# Altium PCB PCBtc.PcbDoc (part 1 of 3)
Units mm, origin at the board's own origin, x right, y up, seen from the top; angles counter-clockwise.
Board outline 94.5 x 103.5 mm, 2 copper layers (Top Layer, Bottom Layer), stack 1.671 mm thick; 71 components, 63 nets, 236 pads, 46 vias.
Unrouted connection lines stored in the file: 2.
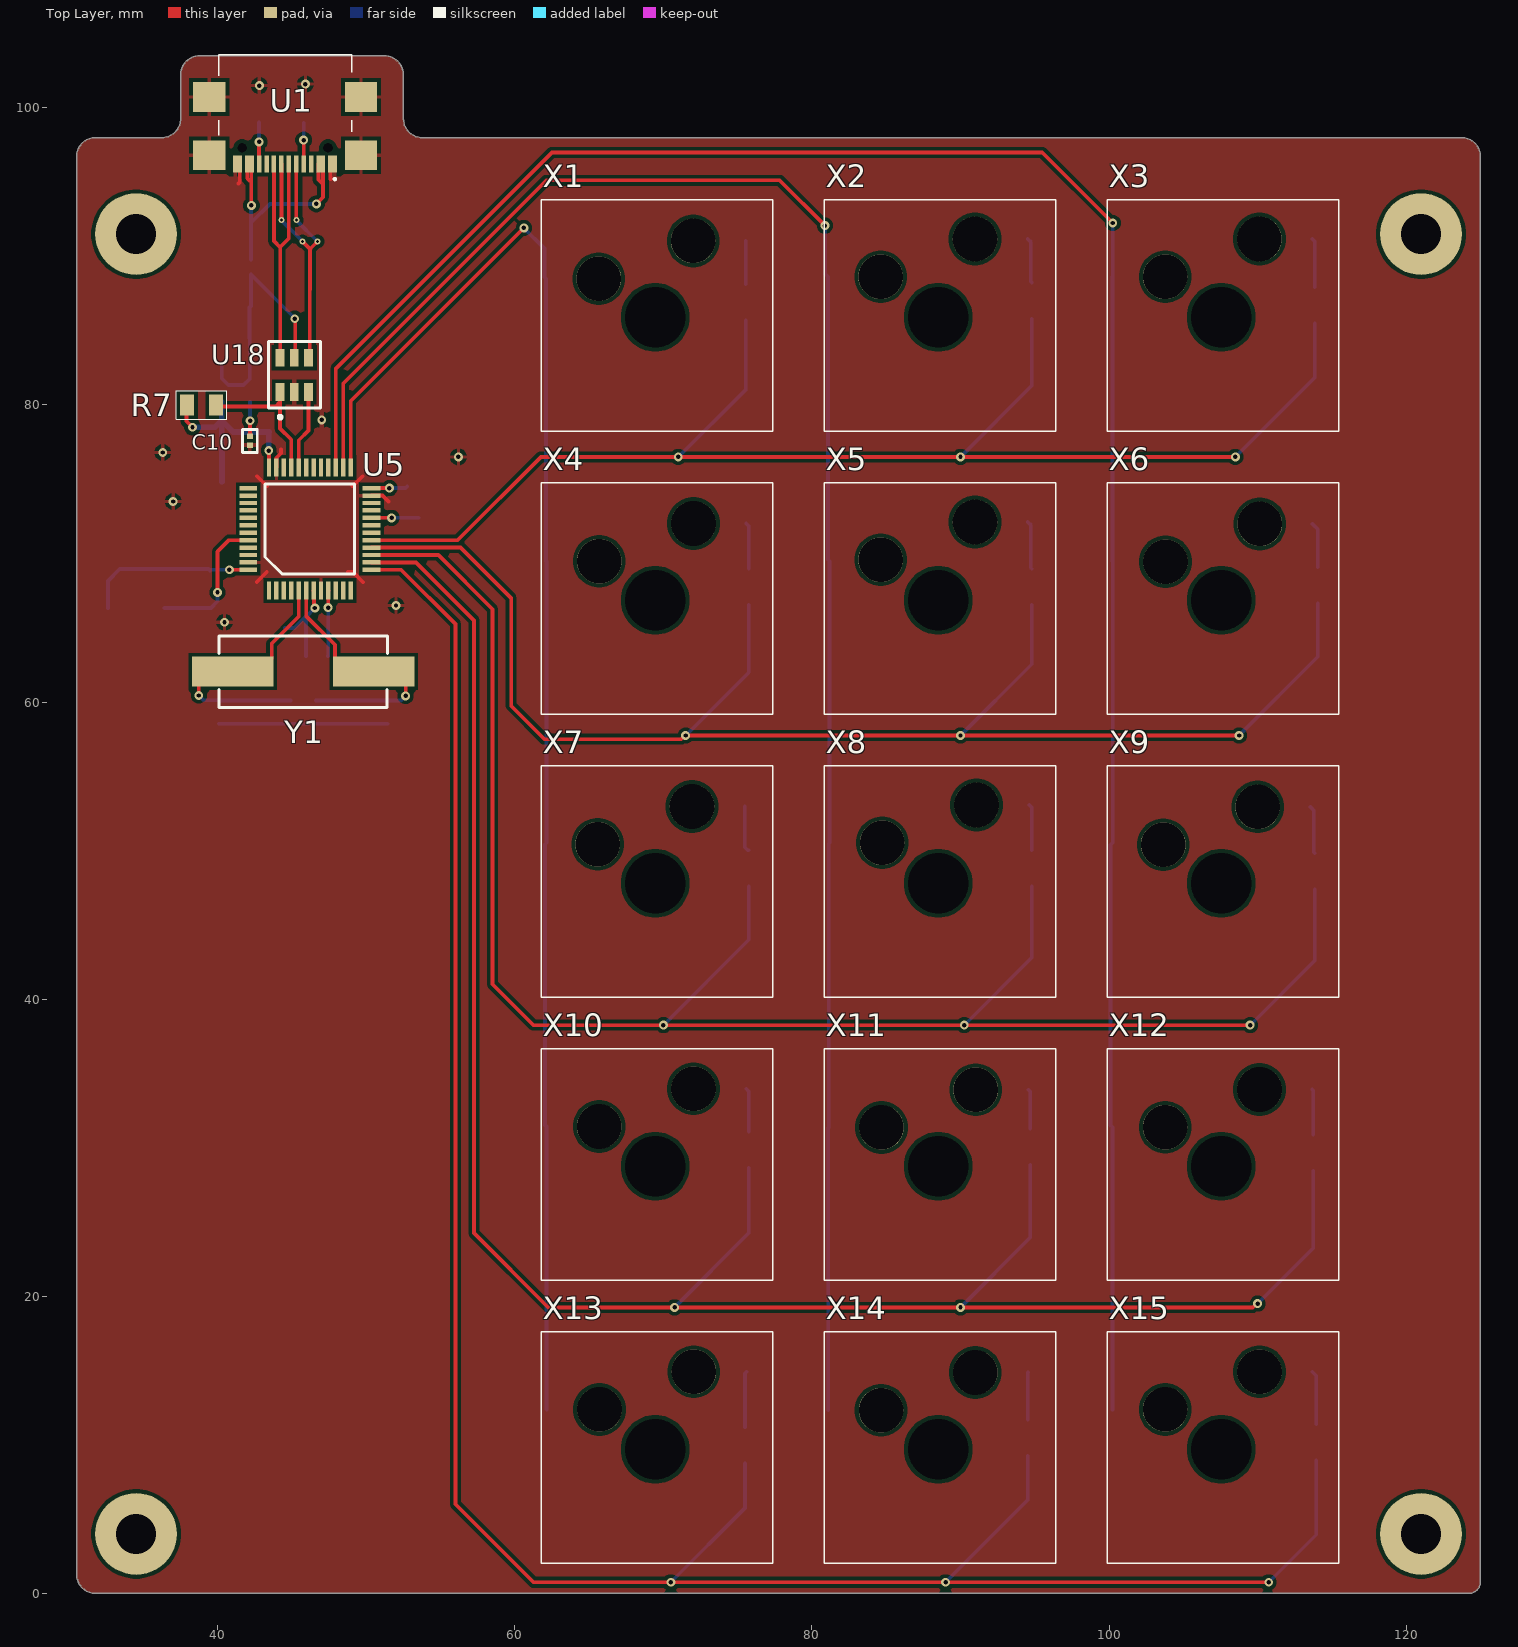
[diagram p0: Top Layer view]
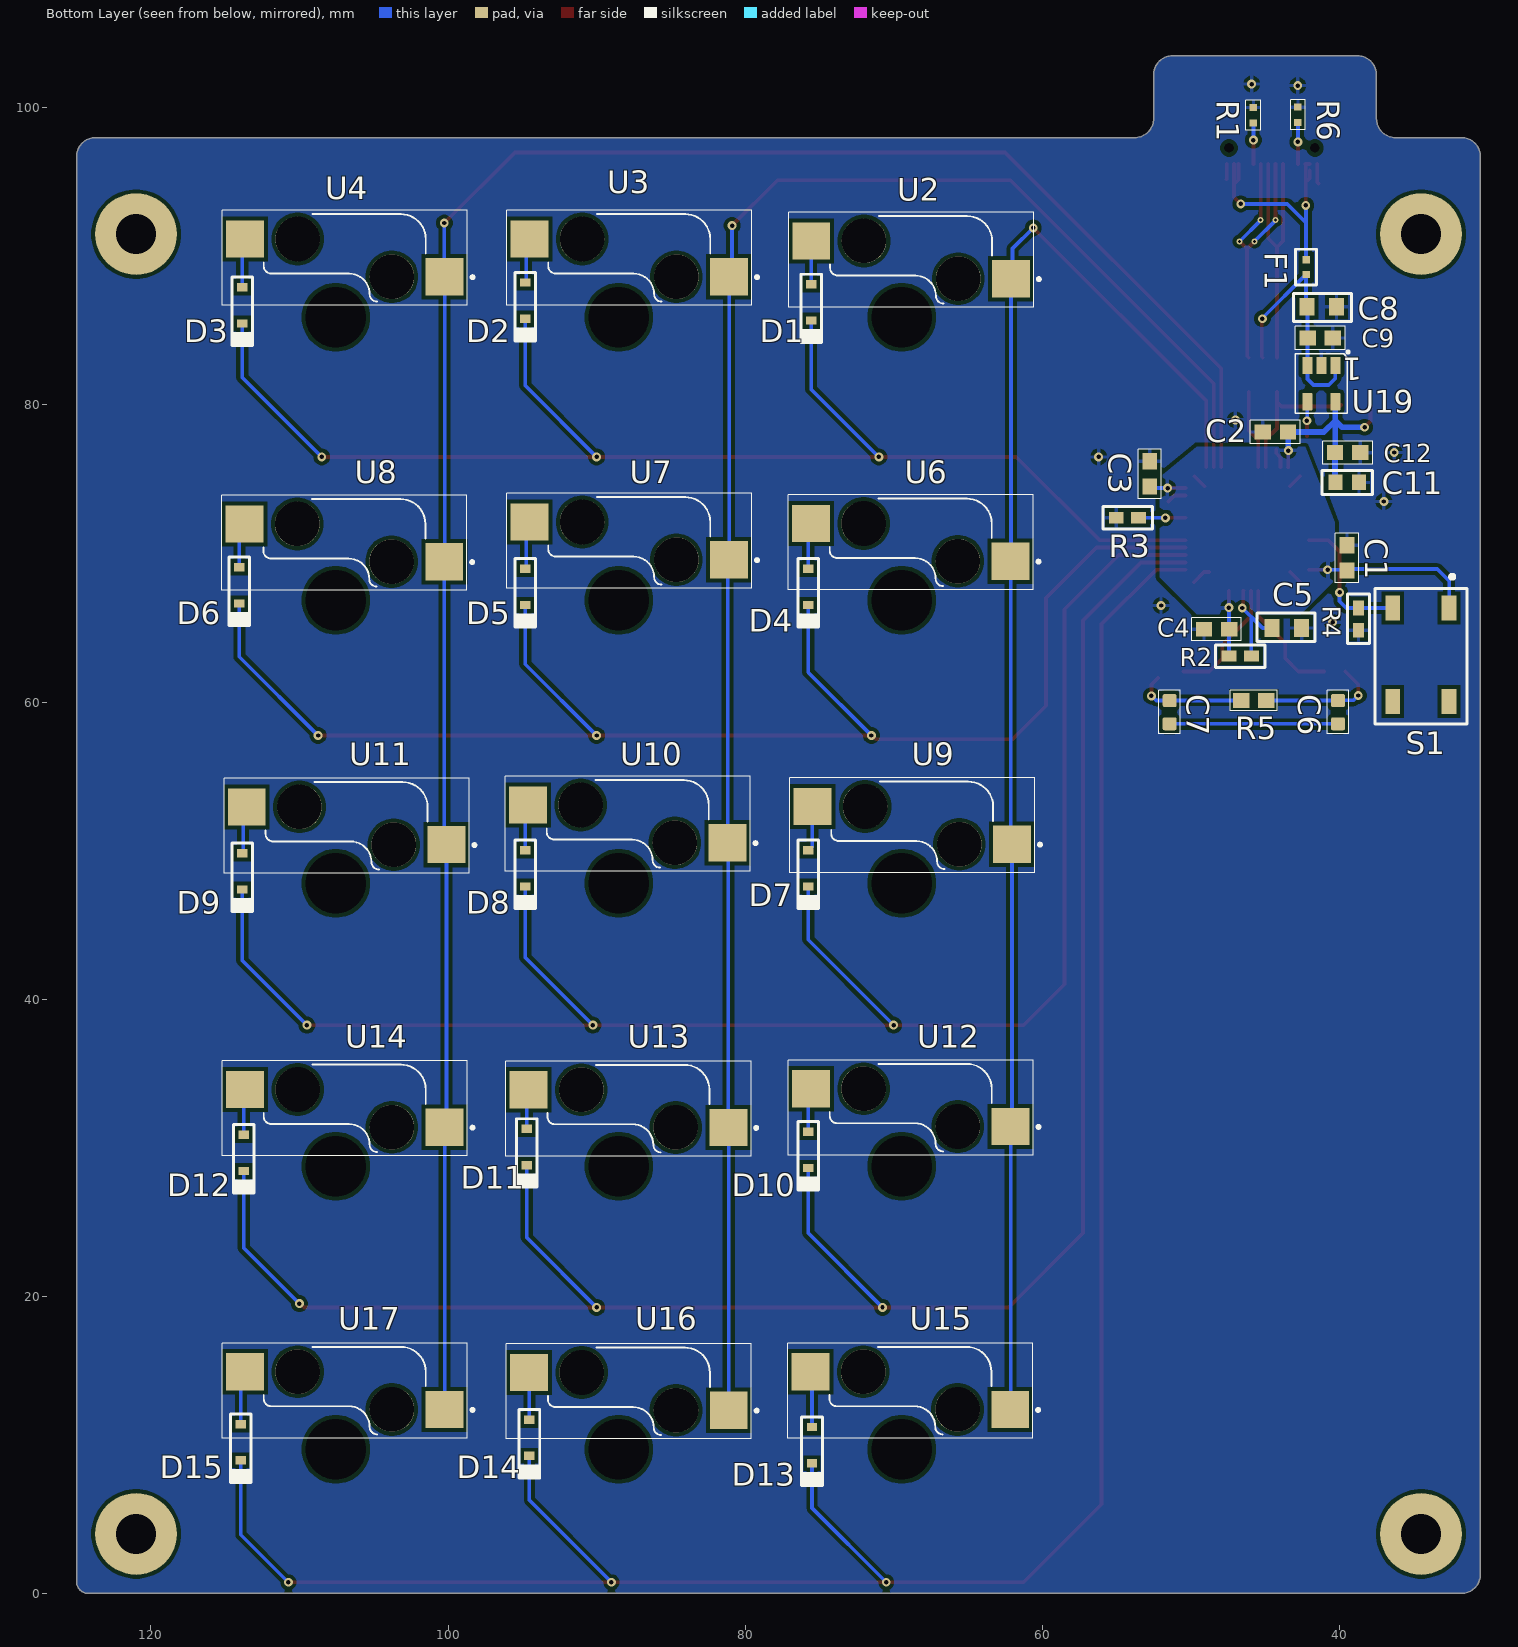
[diagram p1: Bottom Layer view, seen from below]
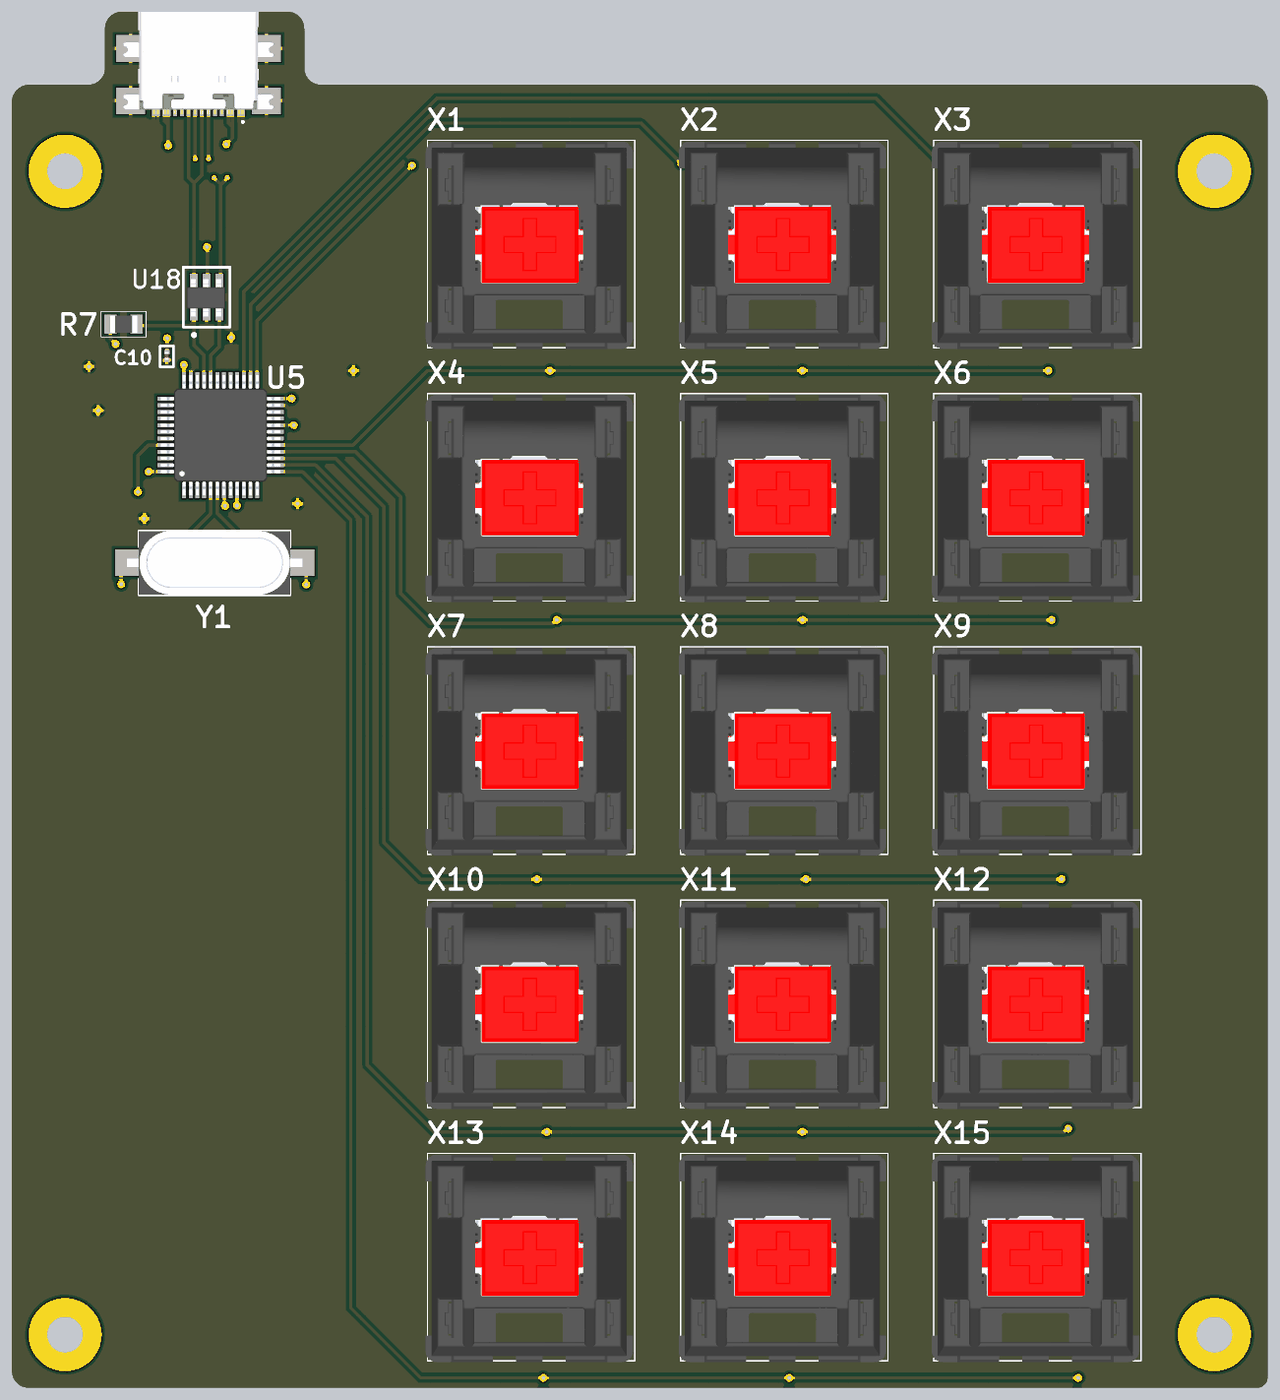
[diagram p2: 3D render of the assembled board from above, using the file's embedded part models]
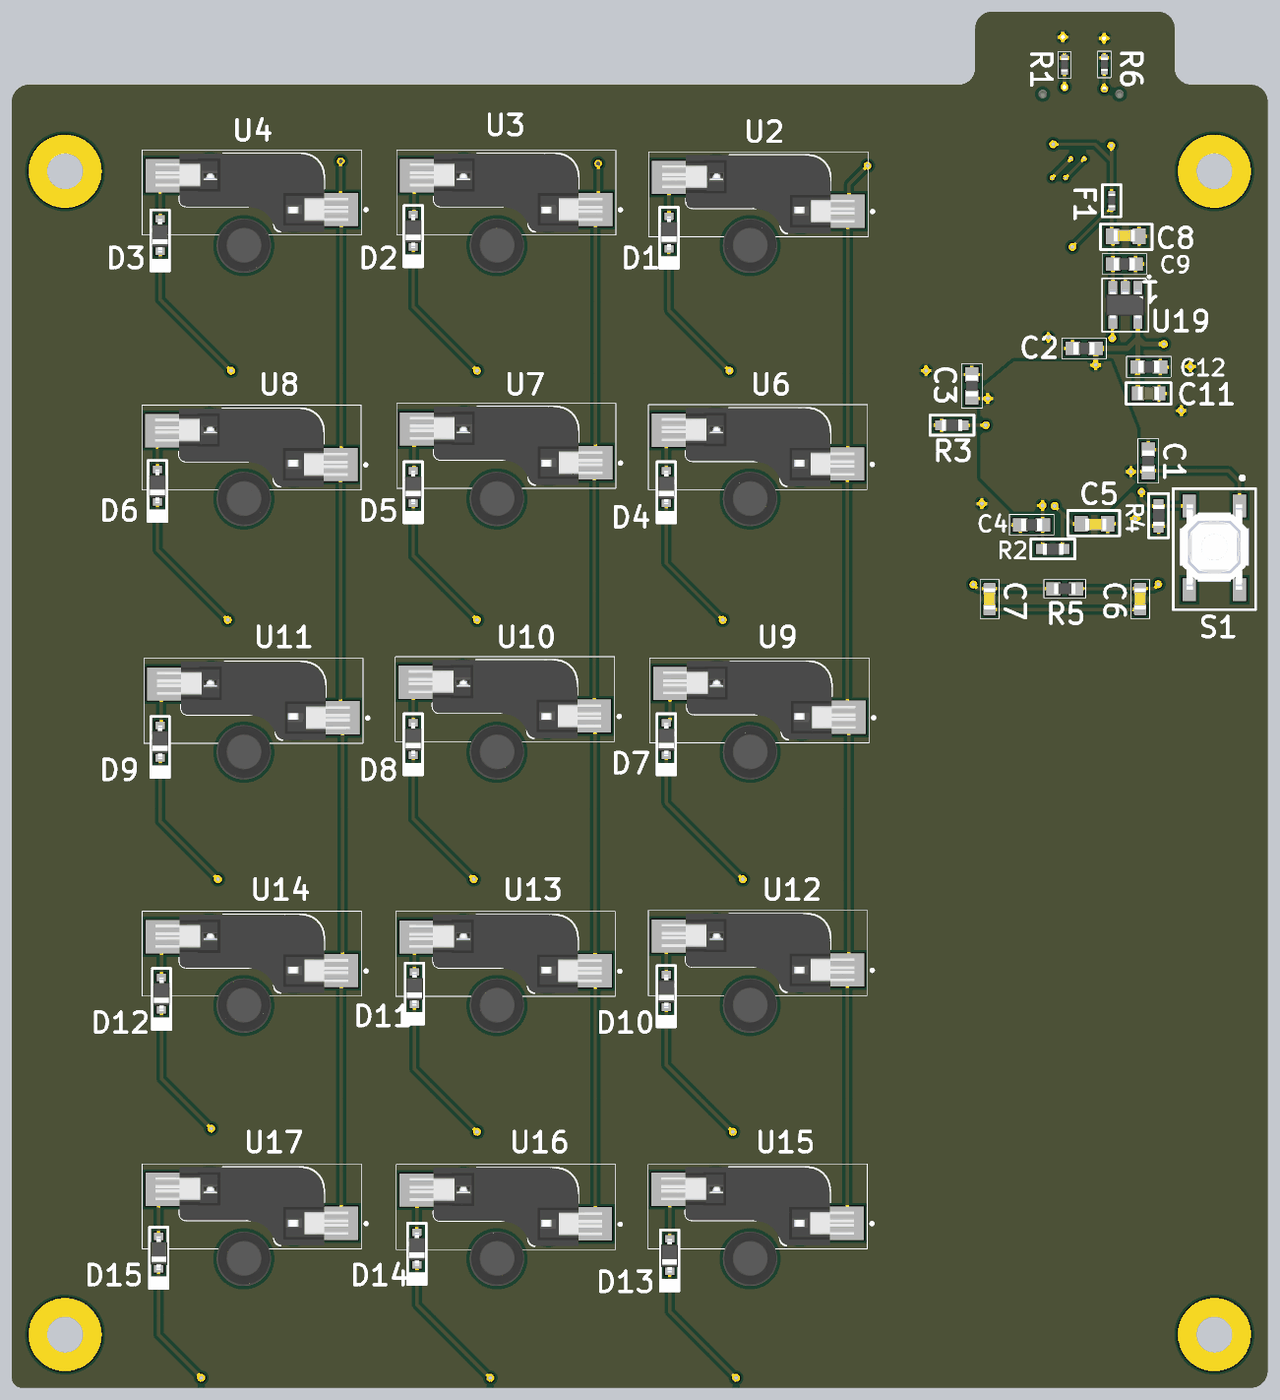
[diagram p3: 3D render of the assembled board from below, using the file's embedded part models]

## Layer stack, top to bottom
Top Solder: solder mask 0.0102, Solder Resist, Dk 3.5
Top Layer: signal copper 0.0356
Dielectric 1: dielectric 1.6, FR-4, Dk 4.8
Bottom Layer: signal copper 0.0356
Bottom Solder: solder mask 0.0102, Solder Resist, Dk 3.5

## Board outline
30.5,1.27 30.5,96.73 cw(c31.77,96.73) 31.77,98 36.23,98 ccw(c36.23,99.27) 37.5,99.27 37.5,102.23 cw(c38.77,102.23) 38.77,103.5 51.23,103.5 cw(c51.23,102.23) 52.5,102.23 52.5,99.27 ccw(c53.77,99.27) 53.77,98 123.73,98 cw(c123.73,96.73) 125,96.73 125,0.77 cw(c124.23,0.77) 124.23,0 31.77,0 cw(c31.77,1.27)

## Design rules (kind name [scope] priority, off if disabled: settings)
Clearance "track e via" [IsTrack or IsVia vs IsTrack] p1: gap=0.15 ignorepadtopadclearanceinfootprint=FALSE
Clearance "capacitor c10" [InComponent('C10') vs InComponent('C10')] p2: gap=0.15 ignorepadtopadclearanceinfootprint=TRUE
Clearance usb-c [(InComponent('U1')) OR (IsPad AND InComponent('U1')) vs (InComponent('U1')) OR IsTrack OR (IsPad AND InComponent('U1'))] p3: gap=0.1 ignorepadtopadclearanceinfootprint=FALSE
Clearance Chip [(InComponent('U5')) OR (IsPad AND InComponent('U5')) vs (InComponent('U5')) OR IsTrack OR (IsPad AND InComponent('U5'))] p4: gap=0.15 ignorepadtopadclearanceinfootprint=FALSE
Clearance [All] p5: gap=0.254 ignorepadtopadclearanceinfootprint=FALSE
ComponentClearance Teclas [InComponentClass('Teclas') vs InComponentClass('Soquetes')] p1: gap=0 collisioncheckmode=3 verticalgap=0 showdistances=FALSE
ComponentClearance [All] p2: gap=0.254 collisioncheckmode=3 verticalgap=0.254 showdistances=FALSE
HoleSize [All] p1: absolutevalues=TRUE maxlimit=5 minlimit=0 maxpercent=80.000 minpercent=20.000
MinimumSolderMaskSliver [All] p1: minsoldermaskwidth=0
PolygonConnect [All] p1: connectstyle=Relief reliefconductorwidth=0.254 reliefentries=4 polygonreliefangle="90 Angle" airgapwidth=0.254
RoutingVias [All] p1: holewidth=0.3 width=0.6 viastyle="Through Hole" minholewidth=0.3 minwidth=0.6 maxholewidth=0.3 maxwidth=0.6
SilkToSilkClearance [All] p1: silktosilkclearance=0.1
SilkToSolderMaskClearance [IsPad] p1: minsilkscreentomaskgap=0.1 clearancetoexposedcopper=TRUE
SolderMaskExpansion [All] p1: expansion=0.102 istentingtop=FALSE
SupplyNets "Schematic Supply Nets_2" [InNet('VCC3V3')] p1: voltage=0.000
SupplyNets "Schematic Supply Nets_1" [InNet('GND')] p2: voltage=0.000
SupplyNets "Schematic Supply Nets" [InNet('5V')] p3: voltage=0.000
Width [All] p1: maxlimit=0.508 minlimit=0.254 preferedwidth=0.254 minimp=50.000000 maximp=50.000000 favimp=50.000000
25 further rules are at their usual default settings.

## Classes and differential pairs
component class Soquetes: U2 U3 U4 U6 U7 U8 U9 U10 U11 U12 U13 U14 U15 U16 U17
component class Teclas: X1 X2 X3 X4 X5 X6 X7 X8 X9 X10 X11 X12 X13 X14 X15

## Components (designator, comment, footprint, x,y, rotation, side; value= is the part's Value field where it differs from the comment)
C1 "104 0603" "Cap 104 0603" 39.484,69.706 r270 bottom value=100nF
C2 "104 0603" "Cap 104 0603" 44.309,78.181 r180 bottom value=100nF
C3 "104 0603" "Cap 104 0603" 52.759,75.356 r270 bottom value=100nF
C4 "104 0603" "Cap 104 0603" 48.259,64.906 r180 bottom value=100nF
C5 "105 0603" "cap 105 0603" 43.534,64.981 r0 bottom value=1µF
C6 "20p 0603" "Cap 20p 0603" 40.088,59.317 r90 bottom value=20pF
C7 "20p 0603" "Cap 20p 0603" 51.424,59.317 r90 bottom value=20pF
C8 "105 0603" "cap 105 0603" 41.183,86.613 r180 bottom value=1µF
C9 "104 0603" "Cap 104 0603" 41.283,84.513 r0 bottom value=100nF
C10 "223 0603" "cap 223 0603" 42.158,77.588 r90 top value=22nF
C11 "106 0603" "cap 106 0603" 39.458,74.788 r0 bottom value=10µF
C12 "104 0603" "Cap 104 0603" 39.436,76.79 r0 bottom value=100nF
D1 "Diodo" Diodo 75.55,86.9 r90 bottom value=2pF
D2 "Diodo" Diodo 94.8,87.02 r90 bottom value=2pF
D3 "Diodo" Diodo 113.85,86.7 r90 bottom value=2pF
D4 "Diodo" Diodo 75.75,67.75 r90 bottom value=2pF
D5 "Diodo" Diodo 94.8,67.75 r90 bottom value=2pF
D6 "Diodo" Diodo 114.05,67.85 r90 bottom value=2pF
D7 "Diodo" Diodo 75.75,48.8 r90 bottom value=2pF
D8 "Diodo" Diodo 94.8,48.8 r90 bottom value=2pF
D9 "Diodo" Diodo 113.85,48.6 r90 bottom value=2pF
D10 "Diodo" Diodo 75.75,29.85 r90 bottom value=2pF
D11 "Diodo" Diodo 94.7,30.05 r90 bottom value=2pF
D12 "Diodo" Diodo 113.75,29.65 r90 bottom value=2pF
D13 "Diodo" Diodo 75.5,9.975 r90 bottom value=2pF
D14 "Diodo" Diodo 94.525,10.475 r90 bottom value=2pF
D15 "Diodo" Diodo 113.95,10.175 r90 bottom value=2pF
F1 "500mA 0402" Fuse 42.234,89.281 r270 bottom value=310mΩ
R1 "5k1 0402" "R 5k1 0402" 45.784,99.506 r90 bottom value=5.1kΩ
R2 "10k 0603" "Resistor 10k 0603" 46.67,63.092 r0 bottom value=10kΩ
R3 "10k 0603" "Resistor 10k 0603" 54.263,72.403 r0 bottom value=10kΩ
R4 "10k 0603" "Resistor 10k 0603" 38.705,65.585 r270 bottom value=10kΩ
R5 "R 1Mr 0603" "R 1Mr 0603" 45.759,60.099 r180 bottom value=1MΩ
R6 "5k1 0402" "R 5k1 0402" 42.784,99.531 r270 bottom value=5.1kΩ
R7 "1,5k R" "R 1.5k" 38.9,80 r180 top value=1.5kΩ
S1 "Switche" Switche 32.605,66.335 r270 bottom
U1 "USB-C" USB-C 44.534,99.906 r180 top
U2 "suporte hot-swap" "Suporte Hot-Swap" 68.825,89.77 r0 bottom
U3 "suporte hot-swap" "Suporte Hot-Swap" 87.8,89.9 r0 bottom
U4 "suporte hot-swap" "Suporte Hot-Swap" 106.95,89.9 r0 bottom
U5 "STM32F103C8T6/64KB FLASH" STM32F103C8T6 43.45,67.5 r90 top
U6 "suporte hot-swap" "Suporte Hot-Swap" 68.85,70.75 r0 bottom
U7 "suporte hot-swap" "Suporte Hot-Swap" 87.8,70.85 r0 bottom
U8 "suporte hot-swap" "Suporte Hot-Swap" 106.975,70.72 r0 bottom
U9 "suporte hot-swap" "Suporte Hot-Swap" 68.75,51.7 r0 bottom
U10 "suporte hot-swap" "Suporte Hot-Swap" 87.9,51.8 r0 bottom
U11 "suporte hot-swap" "Suporte Hot-Swap" 106.825,51.67 r0 bottom
U12 "suporte hot-swap" "Suporte Hot-Swap" 68.85,32.7 r0 bottom
U13 "suporte hot-swap" "Suporte Hot-Swap" 87.853,32.634 r0 bottom
U14 "suporte hot-swap" "Suporte Hot-Swap" 106.95,32.65 r0 bottom
U15 "suporte hot-swap" "Suporte Hot-Swap" 68.875,13.65 r0 bottom
U16 "suporte hot-swap" "Suporte Hot-Swap" 87.825,13.6 r0 bottom
U17 "suporte hot-swap" "Suporte Hot-Swap" 106.95,13.65 r0 bottom
U18 "Protetor de estatica" "Potege estatica" 44.201,80.881 r90 top value=2.5pF
U19 "5V->3V" "Regulador 5v->3v" 41.208,81.438 r270 bottom
X1 "switch" TECLA 65.64,88.44 r0 top
X2 "switch" TECLA 84.69,88.44 r0 top
X3 "switch" TECLA 103.74,88.44 r0 top
X4 "switch" TECLA 65.64,69.39 r0 top
X5 "switch" TECLA 84.69,69.39 r0 top
X6 "switch" TECLA 103.74,69.39 r0 top
X7 "switch" TECLA 65.64,50.34 r0 top
X8 "switch" TECLA 84.69,50.34 r0 top
X9 "switch" TECLA 103.74,50.34 r0 top
X10 "switch" TECLA 65.64,31.29 r0 top
X11 "switch" TECLA 84.69,31.29 r0 top
X12 "switch" TECLA 103.74,31.29 r0 top
X13 "switch" TECLA 65.64,12.24 r0 top
X14 "switch" TECLA 84.69,12.24 r0 top
X15 "switch" TECLA 103.74,12.24 r0 top
Y1 "8MHz" "Cristal 8MHz" 45.759,62.056 r0 top

## Footprints (in the part's own frame and the unit in brackets; to place one, negate y for a bottom-side part, rotate by r counter-clockwise, add the part's x,y. Pads: shape width x height; smd on the part's side, far side on the other; paste and mask are expansions set on the pad)
"Cap 20p 0603" [mm]
  rrect25% 0.87x0.93 smd: 1(-0.78,0) 2(0.78,0)
  silkscreen extent -1.47,-0.71 1.47,0.71, body extent -0.77,-0.45 0.83,0.45, height 0.81
"Cap 104 0603" [mm]
  rect 1.1x1 smd: 1(-0.85,0) 2(0.85,0)
  silkscreen extent -1.67,-0.78 1.67,0.78, body extent -0.8,-0.45 0.8,0.45, height 0.81
"cap 105 0603" [mm]
  rect 1x1.2 smd paste-2539.97: 1(-1,0) 2(1,0)
  silkscreen extent -1.9,-1 2,0.9, body extent -0.9,-0.4 0.7,0.5, height 0.81
"cap 106 0603" [mm]
  rect 0.95x1.03 smd: 1(-0.788,0) 2(0.788,0)
  silkscreen extent -1.7,-0.8 1.7,0.8, body extent -0.8,-0.5 0.8,0.5, height 0.81
"cap 223 0603" [mm]
  rect 0.35x0.4 smd: 1(-0.3,0) 2(0.3,0)
  silkscreen extent -0.8,-0.5 0.77,0.5, body extent -0.27,-0.15 0.33,0.18, height 0.31
"Cristal 8MHz" [mm]
  rect 5.5x2 smd paste-2539.97: 1(-4.75,0) 2(4.75,0)
  silkscreen extent -5.68,-2.42 5.68,2.4, body extent -6.6,-2.41 6.6,2.39, height 4.31
Diodo [mm]
  rect 0.56x0.69 smd: 1(-1.22,0) 2(1.22,0)
  silkscreen extent -2.7,-0.7 1.9,0.7, body extent -1.3,-0.63 1.2,0.63, height 1.16
Fuse [mm]
  rect 0.5x0.5 smd: 1(-0.5,0) 2(0.5,0)
  silkscreen extent -1.2,-0.7 1.2,0.7, body extent -0.5,-0.25 0.5,0.25, height 0.5
"Potege estatica" [mm]
  rect 1.2x0.6 smd: 1(0,0) 2(0,-0.95) 3(0,-1.9) 4(2.3,-1.9) 5(2.3,-0.95) 6(2.3,0)
  silkscreen extent -1.8,-2.7 3.4,0.8, body extent -0.3,-2.36 2.5,0.56, height 1.31
"R 1.5k" [mm]
  rect 0.93x1.42 smd: 1(-0.979,0) 2(0.979,0)
  silkscreen extent -1.69,-0.96 1.69,0.96, body extent -1.03,-0.64 1,0.64, height 0.65
"R 1Mr 0603" [mm]
  rect 1.1x1 smd: 1(-0.85,0) 2(0.85,0)
  silkscreen extent -1.57,-0.68 1.57,0.68, body extent -0.8,-0.4 0.8,0.4, height 0.46
"R 5k1 0402" [mm]
  rect 0.475x0.5 smd: 1(-0.512,0) 2(0.512,0)
  silkscreen extent -1,-0.5 1,0.5, body extent -0.5,-0.25 0.5,0.25, height 0.36
"Regulador 5v->3v" [mm]
  rrect12% 1.17x0.67 smd: 1(-1.22,0.94) 2(-1.22,0) 3(-1.22,-0.94) 4(1.22,-0.94) 5(1.22,0.94)
  silkscreen extent -2.17,-1.75 2,1.85, body extent -1.4,-1.45 1.4,1.45, height 1.16
"Resistor 10k 0603" [mm]
  rect 1x0.75 smd paste-2539.97: 1(-0.75,0) 2(0.75,0)
  silkscreen extent -1.68,-0.75 1.65,0.75, body extent -0.8,-0.43 0.75,0.43, height 0.56
STM32F103C8T6 [mm]
  rect 1.2x0.3 smd: 1(0,0) 2(0,-0.5) 3(0,-1) 4(0,-1.5) 5(0,-2) 6(0,-2.5) 7(0,-3) 8(0,-3.5) 9(0,-4) 10(0,-4.5) 11(0,-5) 12(0,-5.5) 25(8.3,-5.5) 26(8.3,-5) 27(8.3,-4.5) 28(8.3,-4) 29(8.3,-3.5) 30(8.3,-3) 31(8.3,-2.5) 32(8.3,-2) 33(8.3,-1.5) 34(8.3,-1) 35(8.3,-0.5) 36(8.3,0)
  rect 0.3x1.2 smd: 13(1.4,-6.9) 14(1.9,-6.9) 15(2.4,-6.9) 16(2.9,-6.9) 17(3.4,-6.9) 18(3.9,-6.9) 19(4.4,-6.9) 20(4.9,-6.9) 21(5.4,-6.9) 22(5.9,-6.9) 23(6.4,-6.9) 24(6.9,-6.9) 37(6.9,1.4) 38(6.4,1.4) 39(5.9,1.4) 40(5.4,1.4) 41(4.9,1.4) 42(4.4,1.4) 43(3.9,1.4) 44(3.4,1.4) 45(2.9,1.4) 46(2.4,1.4) 47(1.9,1.4) 48(1.4,1.4)
  silkscreen extent 1.13,-5.76 7.16,0.27, body extent -0.35,-7.25 8.65,1.75, height 1.46
"Suporte Hot-Swap" [mm]
  rect 2.55x2.5 smd: 1(-6.725,1.27) 2(6.725,-1.27)
  round 3 hole 3 unplated: ""(-3.175,1.27) ""(3.175,-1.27)
  silkscreen extent -8.7,-3.19 8.25,3.19, body extent -7.25,-2.95 7.25,2.95, height 1.81
Switche [mm]
  rect 1.7x1 smd: 1(0,0) 2(0,-3.8) 3(6.3,-3.8) 4(6.3,0)
  silkscreen extent -2.24,-5 7.8,1.2, body extent -0.1,-4.5 6.3,0.7, height 1.51
TECLA [mm]
  round 2.045 hole 4.089 unplated: MH1(3.81,-2.54)
  silkscreen extent -3.86,-10.21 11.74,5.39, body extent -4.01,-10.31 11.59,5.29, height 15.41
USB-C [mm]
  rect 0.3x1.15 smd: A1(-3.35,3.678) A4(-2.55,3.678) A5(-1.25,3.678) A6(-0.25,3.678) A7(0.25,3.678) A8(1.25,3.678) A9(2.55,3.678) A12(3.35,3.678) B1(3.05,3.678) B4(2.25,3.678) B5(1.75,3.678) B6(0.75,3.678) B7(-0.75,3.678) B8(-1.75,3.678) B9(-2.25,3.678) B12(-3.05,3.678)
  round 0.325 hole 0.65 unplated: MH1(-2.89,2.603) MH2(2.89,2.603)
  rect 2.18x2 smd: MP1(-5.11,-0.827) MP2(5.11,-0.827) MP3(-5.11,3.103) MP4(5.11,3.103)
  silkscreen extent -4.5,-3.68 4.47,4.75, body extent -5.65,-3.58 5.65,4.12, height 3.27

## Part data
C1 C2 C3 C4 C9 C12: library part CC0603KRX7R7BB104, "16V 100nF X7R ±10% 0603 Multilayer Ceramic Capacitors MLCC - SMD/SMT ROHS", Case Code (Imperial)=0603, Case Code (Metric)=1608, Dielectric=X7R, Dielectric Material=Ceramic, Insulation Resistance=100GΩ, Manufacturer="Yageo Group", Max Operating Temperature=125°C, Min Operating Temperature=-55°C, Supplier Part Number=311-1088-1-ND, Tolerance=10%, Voltage=16V, Case/Package=0603, Category="Ceramic Capacitors", China RoHS=Compliant, ComponentLink1Description=https://datasheet.octopart.com:443/CC0603KRX7R7BB104-Yageo-datasheet-177165144.pdf?src-supplier=IHS, ComponentLink1URL=https://datasheet.octopart.com:443/CC0603KRX7R7BB104-Yageo-datasheet-177165144.pdf?src-supplier=IHS, ComponentLink2Description=https://datasheet.octopart.com:443/CC0603KRX7R7BB104-Yageo-datasheet-82288757.pdf?src-supplier=Upverter, ComponentLink2URL=https://datasheet.octopart.com:443/CC0603KRX7R7BB104-Yageo-datasheet-82288757.pdf?src-supplier=Upverter, ComponentLink3Description=https://datasheet.octopart.com:443/CC0603KRX7R7BB104-Yageo-datasheet-182050803.pdf?src-supplier=Newark, ComponentLink3URL=https://datasheet.octopart.com:443/CC0603KRX7R7BB104-Yageo-datasheet-182050803.pdf?src-supplier=Newark, ComponentLink4Description=https://datasheet.octopart.com:443/CC0603KRX7R7BB104-Yageo-datasheet-181968638.pdf?src-supplier=Newark, ComponentLink4URL=https://datasheet.octopart.com:443/CC0603KRX7R7BB104-Yageo-datasheet-181968638.pdf?src-supplier=Newark, ComponentLink5Description=https://datasheet.octopart.com:443/CC0603KRX7R7BB104-Phycomp-datasheet-499490.pdf?src-supplier=Newark, ComponentLink5URL=https://datasheet.octopart.com:443/CC0603KRX7R7BB104-Phycomp-datasheet-499490.pdf?src-supplier=Newark, ComponentLink6Description=https://datasheet.octopart.com:443/CC0603KRX7R7BB104-Yageo-datasheet-62336348.pdf?src-supplier=Newark, ComponentLink6URL=https://datasheet.octopart.com:443/CC0603KRX7R7BB104-Yageo-datasheet-62336348.pdf?src-supplier=Newark, ComponentLink7Description=https://datasheet.octopart.com:443/CC0603KRX7R7BB104-Yageo-datasheet-15895757.pdf?src-supplier=Newark, ComponentLink7URL=https://datasheet.octopart.com:443/CC0603KRX7R7BB104-Yageo-datasheet-15895757.pdf?src-supplier=Newark, ComponentLink8Description=https://datasheet.octopart.com/CC0603KRX7R7BB104-Yageo-datasheet-10883670.pdf, ComponentLink8URL=https://datasheet.octopart.com/CC0603KRX7R7BB104-Yageo-datasheet-10883670.pdf, ComponentLink9Description=https://datasheet.octopart.com/CC0603KRX7R7BB104-Yageo-datasheet-12526321.pdf, ComponentLink9URL=https://datasheet.octopart.com/CC0603KRX7R7BB104-Yageo-datasheet-12526321.pdf, ComponentLink10Description=https://datasheet.octopart.com:443/CC0603KRX7R7BB104-Yageo-datasheet-151948686.pdf?src-supplier=Farnell, ComponentLink10URL=https://datasheet.octopart.com:443/CC0603KRX7R7BB104-Yageo-datasheet-151948686.pdf?src-supplier=Farnell, ComponentLink11Description=https://datasheet.octopart.com:443/CC0603KRX7R7BB104-Phycomp-datasheet-500777.pdf?src-supplier=Farnell, ComponentLink11URL=https://datasheet.octopart.com:443/CC0603KRX7R7BB104-Phycomp-datasheet-500777.pdf?src-supplier=Farnell, ComponentLink12Description=https://datasheet.octopart.com:443/CC0603KRX7R7BB104-Phycomp-datasheet-519481.pdf?src-supplier=element14, ComponentLink12URL=https://datasheet.octopart.com:443/CC0603KRX7R7BB104-Phycomp-datasheet-519481.pdf?src-supplier=element14, ComponentLink13Description=https://datasheet.octopart.com:443/CC0603KRX7R7BB104-Yageo-datasheet-8701427.pdf?src-supplier=element14, ComponentLink13URL=https://datasheet.octopart.com:443/CC0603KRX7R7BB104-Yageo-datasheet-8701427.pdf?src-supplier=element14, ComponentLink14Description=https://datasheet.octopart.com:443/CC0603KRX7R7BB104-Yageo-datasheet-5301394.pdf?src-supplier=element14, ComponentLink14URL=https://datasheet.octopart.com:443/CC0603KRX7R7BB104-Yageo-datasheet-5301394.pdf?src-supplier=element14, ComponentLink15Description=https://datasheet.octopart.com:443/CC0603KRX7R7BB104-Yageo-datasheet-166511530.pdf?src-supplier=Future+Electronics, ComponentLink15URL=https://datasheet.octopart.com:443/CC0603KRX7R7BB104-Yageo-datasheet-166511530.pdf?src-supplier=Future+Electronics, ComponentLink16Description=https://datasheet.octopart.com:443/CC0603KRX7R7BB104-Yageo-datasheet-137700082.pdf?src-supplier=Future+Electronics, ComponentLink16URL=https://datasheet.octopart.com:443/CC0603KRX7R7BB104-Yageo-datasheet-137700082.pdf?src-supplier=Future+Electronics, ComponentLink17Description=https://datasheet.octopart.com:443/CC0603KRX7R7BB104-Yageo-datasheet-137700084.pdf?src-supplier=Future+Electronics, ComponentLink17URL=https://datasheet.octopart.com:443/CC0603KRX7R7BB104-Yageo-datasheet-137700084.pdf?src-supplier=Future+Electronics, ComponentLink18Description=https://datasheet.octopart.com:443/CC0603KRX7R7BB104-Yageo-datasheet-27626582.pdf?src-supplier=Future+Electronics, ComponentLink18URL=https://datasheet.octopart.com:443/CC0603KRX7R7BB104-Yageo-datasheet-27626582.pdf?src-supplier=Future+Electronics, ComponentLink19Description=https://datasheet.octopart.com:443/CC0603KRX7R7BB104-Yageo-datasheet-10911834.pdf?src-supplier=Future+Electronics, ComponentLink19URL=https://datasheet.octopart.com:443/CC0603KRX7R7BB104-Yageo-datasheet-10911834.pdf?src-supplier=Future+Electronics, ComponentLink20Description=https://datasheet.octopart.com:443/CC0603KRX7R7BB104-Yageo-datasheet-8324442.pdf?src-supplier=Future+Electronics, ComponentLink20URL=https://datasheet.octopart.com:443/CC0603KRX7R7BB104-Yageo-datasheet-8324442.pdf?src-supplier=Future+Electronics, ComponentLink21Description=https://datasheet.octopart.com:443/CC0603KRX7R7BB104-Yageo-Group-datasheet-165992755.pdf?src-supplier=ODG+(Origin+Data+Global), ComponentLink21URL=https://datasheet.octopart.com:443/CC0603KRX7R7BB104-Yageo-Group-datasheet-165992755.pdf?src-supplier=ODG+(Origin+Data+Global), ComponentLink22Description=https://datasheet.octopart.com:443/CC0603KRX7R7BB104-Yageo-datasheet-140260305.pdf?src-supplier=SOS+electronic, ComponentLink22URL=https://datasheet.octopart.com:443/CC0603KRX7R7BB104-Yageo-datasheet-140260305.pdf?src-supplier=SOS+electronic, ComponentLink23Description=https://datasheet.octopart.com:443/CC0603KRX7R7BB104-Yageo-datasheet-178018956.pdf?src-supplier=Burklin+Elektronik, ComponentLink23URL=https://datasheet.octopart.com:443/CC0603KRX7R7BB104-Yageo-datasheet-178018956.pdf?src-supplier=Burklin+Elektronik, ComponentLink24Description=https://datasheet.octopart.com:443/CC0603KRX7R7BB104-Yageo-datasheet-17600895.pdf?src-supplier=TME, ComponentLink24URL=https://datasheet.octopart.com:443/CC0603KRX7R7BB104-Yageo-datasheet-17600895.pdf?src-supplier=TME, ComponentLink25Description=https://datasheet.octopart.com:443/CC0603KRX7R7BB104-Yageo-datasheet-118396.pdf?src-supplier=DigiKey, ComponentLink25URL=https://datasheet.octopart.com:443/CC0603KRX7R7BB104-Yageo-datasheet-118396.pdf?src-supplier=DigiKey, ComponentLink26Description=http://sigma.octopart.com:80/rohs_statement/Surface-Mount-Ceramic-Multilayer-Capacitors%3B-General-Purpose-%26-High-Capacitance-Class-2%2C-X7R-Yageo-family-124.pdf?src-supplier=Compliance+Statements, ComponentLink26URL=http://sigma.octopart.com:80/rohs_statement/Surface-Mount-Ceramic-Multilayer-Capacitors%3B-General-Purpose-%26-High-Capacitance-Class-2%2C-X7R-Yageo-family-124.pdf?src-supplier=Compliance+Statements, ComponentLink27Description=http://sigma.octopart.com:80/reach_statement/Surface-Mount-Ceramic-Multilayer-Capacitors%3B-General-Purpose-%26-High-Capacitance-Class-2%2C-X7R-Yageo-family-125.pdf?src-supplier=Compliance+Statements, ComponentLink27URL=http://sigma.octopart.com:80/reach_statement/Surface-Mount-Ceramic-Multilayer-Capacitors%3B-General-Purpose-%26-High-Capacitance-Class-2%2C-X7R-Yageo-family-125.pdf?src-supplier=Compliance+Statements, ComponentLink28Description=http://sigma.octopart.com:80/conflict_mineral_statement/Yageo-company-3.pdf?src-supplier=Compliance+Statements, ComponentLink28URL=http://sigma.octopart.com:80/conflict_mineral_statement/Yageo-company-3.pdf?src-supplier=Compliance+Statements, ComponentLink29Description=http://sigma.octopart.com:80/rohs_statement/Yageo-company-2.pdf?src-supplier=Compliance+Statements, ComponentLink29URL=http://sigma.octopart.com:80/rohs_statement/Yageo-company-2.pdf?src-supplier=Compliance+Statements, Composition=Ceramic, Depth=800µm, Halogen Free="Halogen Free", Height=800µm, Lead Free="Lead Free", Length=1.6mm, Lifecycle Status=Production, Manufacturer Part Number=CC0603KRX7R7BB104, Material=Ceramic, Mounting Technology="Surface Mount", Number of Terminals=2, Pins=2, Pricing="1=0,08, 10=0,008, 50=0,0076, 100=0,0072, 500=0,00602 (USD)", Radiation Hardening=No, REACH SVHC=Yes, RoHS=Compliant, Schedule B="8532240020, 8532240020|8532240020, 8532240020|8532240020|8532240020, 8532240020|8532240020|8532240020|8532240020", Stock=6931735, Supplier=DigiKey, Termination=SMD/SMT, Thickness=889µm, Voltage Rating=16V, Voltage Rating (DC)=16V, Width=800µm
C5 C8: library part CL10B105KP8NNNC, "10V 1uF X7R ±10% 0603 Multilayer Ceramic Capacitors MLCC - SMD/SMT ROHS", Case Code (Imperial)=0603, Case Code (Metric)=1608, Dielectric=X7R, Dielectric Material=Ceramic, Manufacturer="Samsung Electro-Mechanics", Max Operating Temperature=125°C, Min Operating Temperature=-55°C, Supplier Part Number=1276-1946-1-ND, Tolerance=10%, Voltage Rating=10V, Case/Package=0603, Category="Ceramic Capacitors", China RoHS=Compliant, ComponentLink1Description=https://datasheet.octopart.com:443/CL10B105KP8NNNC-Samsung-Electro-Mechanics-datasheet-136482318.pdf?src-supplier=IHS, ComponentLink1URL=https://datasheet.octopart.com:443/CL10B105KP8NNNC-Samsung-Electro-Mechanics-datasheet-136482318.pdf?src-supplier=IHS, ComponentLink2Description=https://datasheet.octopart.com:443/CL10B105KP8NNNC-Samsung-Electro-Mechanics-datasheet-116051279.pdf?src-supplier=Future+Electronics, ComponentLink2URL=https://datasheet.octopart.com:443/CL10B105KP8NNNC-Samsung-Electro-Mechanics-datasheet-116051279.pdf?src-supplier=Future+Electronics, ComponentLink3Description=https://datasheet.octopart.com:443/CL10B105KP8NNNC-Samsung-Electro-Mechanics-datasheet-81461854.pdf?src-supplier=Future+Electronics, ComponentLink3URL=https://datasheet.octopart.com:443/CL10B105KP8NNNC-Samsung-Electro-Mechanics-datasheet-81461854.pdf?src-supplier=Future+Electronics, ComponentLink4Description=https://datasheet.octopart.com:443/CL10B105KP8NNNC-Samsung-datasheet-13325309.pdf?src-supplier=Future+Electronics, ComponentLink4URL=https://datasheet.octopart.com:443/CL10B105KP8NNNC-Samsung-datasheet-13325309.pdf?src-supplier=Future+Electronics, ComponentLink5Description=https://datasheet.octopart.com:443/CL10B105KP8NNNC-Samsung-datasheet-26669024.pdf?src-supplier=Future+Electronics, ComponentLink5URL=https://datasheet.octopart.com:443/CL10B105KP8NNNC-Samsung-datasheet-26669024.pdf?src-supplier=Future+Electronics, ComponentLink6Description=https://datasheet.octopart.com:443/CL10B105KP8NNNC-Samsung-Electro-Mechanics-datasheet-149136800.pdf?src-supplier=Future+Electronics, ComponentLink6URL=https://datasheet.octopart.com:443/CL10B105KP8NNNC-Samsung-Electro-Mechanics-datasheet-149136800.pdf?src-supplier=Future+Electronics, ComponentLink7Description=https://datasheet.octopart.com:443/CL10B105KP8NNNC-Samsung-datasheet-37081328.pdf?src-supplier=Future+Electronics, ComponentLink7URL=https://datasheet.octopart.com:443/CL10B105KP8NNNC-Samsung-datasheet-37081328.pdf?src-supplier=Future+Electronics, ComponentLink8Description=https://datasheet.octopart.com/CL10B105KP8NNNC-Samsung-Electro-Mechanics-datasheet-97040617.pdf, ComponentLink8URL=https://datasheet.octopart.com/CL10B105KP8NNNC-Samsung-Electro-Mechanics-datasheet-97040617.pdf, ComponentLink9Description=https://datasheet.octopart.com/CL10B105KP8NNNC-Samsung-Electro-Mechanics-datasheet-8324245.pdf, ComponentLink9URL=https://datasheet.octopart.com/CL10B105KP8NNNC-Samsung-Electro-Mechanics-datasheet-8324245.pdf, ComponentLink10Description=https://datasheet.octopart.com:443/CL10B105KP8NNNC-Samsung-Electro-Mechanics-datasheet-11881110.pdf?src-supplier=Arrow+Electronics, ComponentLink10URL=https://datasheet.octopart.com:443/CL10B105KP8NNNC-Samsung-Electro-Mechanics-datasheet-11881110.pdf?src-supplier=Arrow+Electronics, ComponentLink11Description=https://datasheet.octopart.com:443/CL10B105KP8NNNC-Samsung-datasheet-59220082.pdf?src-supplier=TME, ComponentLink11URL=https://datasheet.octopart.com:443/CL10B105KP8NNNC-Samsung-datasheet-59220082.pdf?src-supplier=TME, Contact Plating=Tin, Depth=800µm, Height=900µm, Lead Free="Lead Free", Length=1.6mm, Lifecycle Status=Production, Manufacturer Part Number=CL10B105KP8NNNC, Material=Ceramic, Mounting Technology="Surface Mount", Number of Terminals=2, Pricing="1=0,08, 10=0,005 (USD)", Radiation Hardening=No, REACH SVHC=Yes, RoHS=Compliant, Schedule B="8532240020, 8532240020|8532240020, 8532240020|8532240020|8532240020, 8532240020|8532240020|8532240020|8532240020", Stock=4700118, Supplier=DigiKey, Thickness=889µm, Voltage Rating (DC)=10V, Width=800µm
C6 C7: library part CL10C200JB8NNNC, "50V 20pF C0G ±5% 0603 Multilayer Ceramic Capacitors MLCC - SMD/SMT ROHS", Case Code (Imperial)=0603, Case Code (Metric)=1608, Dielectric=C0G, Dielectric Material=Ceramic, Manufacturer="Samsung Electro-Mechanics", Max Operating Temperature=125°C, Min Operating Temperature=-55°C, Supplier Part Number=1276-1187-1-ND, Temperature Coefficient=300ppm/°C, Tolerance=5%, Voltage=50V, Case/Package=0603, Category="Ceramic Capacitors", China RoHS=Compliant, ComponentLink1Description=https://datasheet.octopart.com:443/CL10C200JB8NNNC-Samsung-Electro-Mechanics-datasheet-136482411.pdf?src-supplier=IHS, ComponentLink1URL=https://datasheet.octopart.com:443/CL10C200JB8NNNC-Samsung-Electro-Mechanics-datasheet-136482411.pdf?src-supplier=IHS, ComponentLink2Description=https://datasheet.octopart.com:443/CL10C200JB8NNNC-Samsung-Electro-Mechanics-datasheet-81462001.pdf?src-supplier=Upverter, ComponentLink2URL=https://datasheet.octopart.com:443/CL10C200JB8NNNC-Samsung-Electro-Mechanics-datasheet-81462001.pdf?src-supplier=Upverter, ComponentLink3Description=https://datasheet.octopart.com/CL10C200JB8NNNC-Samsung-Electro-Mechanics-datasheet-8324245.pdf, ComponentLink3URL=https://datasheet.octopart.com/CL10C200JB8NNNC-Samsung-Electro-Mechanics-datasheet-8324245.pdf, ComponentLink4Description=https://datasheet.octopart.com/CL10C200JB8NNNC-Samsung-Electro-Mechanics-datasheet-97040617.pdf, ComponentLink4URL=https://datasheet.octopart.com/CL10C200JB8NNNC-Samsung-Electro-Mechanics-datasheet-97040617.pdf, ComponentLink5Description=https://datasheet.octopart.com/General-Multilayer-Ceramic-Capacitors-Samsung-datasheet-family-111.pdf, ComponentLink5URL=https://datasheet.octopart.com/General-Multilayer-Ceramic-Capacitors-Samsung-datasheet-family-111.pdf, ComponentLink6Description=https://datasheet.octopart.com:443/CL10C200JB8NNNC-Samsung-Electro-Mechanics-datasheet-110226352.pdf?src-supplier=Future+Electronics, ComponentLink6URL=https://datasheet.octopart.com:443/CL10C200JB8NNNC-Samsung-Electro-Mechanics-datasheet-110226352.pdf?src-supplier=Future+Electronics, ComponentLink7Description=https://datasheet.octopart.com:443/CL10C200JB8NNNC-Samsung-datasheet-42280588.pdf?src-supplier=Future+Electronics, ComponentLink7URL=https://datasheet.octopart.com:443/CL10C200JB8NNNC-Samsung-datasheet-42280588.pdf?src-supplier=Future+Electronics, ComponentLink8Description=https://datasheet.octopart.com:443/CL10C200JB8NNNC-Samsung-datasheet-26669145.pdf?src-supplier=Future+Electronics, ComponentLink8URL=https://datasheet.octopart.com:443/CL10C200JB8NNNC-Samsung-datasheet-26669145.pdf?src-supplier=Future+Electronics, ComponentLink9Description=https://datasheet.octopart.com:443/CL10C200JB8NNNC-Samsung-Electro-Mechanics-datasheet-149136897.pdf?src-supplier=Future+Electronics, ComponentLink9URL=https://datasheet.octopart.com:443/CL10C200JB8NNNC-Samsung-Electro-Mechanics-datasheet-149136897.pdf?src-supplier=Future+Electronics, ComponentLink10Description=https://datasheet.octopart.com:443/CL10C200JB8NNNC-Samsung-datasheet-8326407.pdf?src-supplier=TME, ComponentLink10URL=https://datasheet.octopart.com:443/CL10C200JB8NNNC-Samsung-datasheet-8326407.pdf?src-supplier=TME, ComponentLink11Description=https://datasheet.octopart.com:443/CL10C200JB8NNNC-Samsung-Electro-Mechanics-datasheet-11541288.pdf?src-supplier=Arrow+Electronics, ComponentLink11URL=https://datasheet.octopart.com:443/CL10C200JB8NNNC-Samsung-Electro-Mechanics-datasheet-11541288.pdf?src-supplier=Arrow+Electronics, ComponentLink12Description=http://sigma.octopart.com:80/rohs_certificate/General-Multilayer-Ceramic-Capacitors-Samsung-family-110.pdf?src-supplier=Compliance+Statements, ComponentLink12URL=http://sigma.octopart.com:80/rohs_certificate/General-Multilayer-Ceramic-Capacitors-Samsung-family-110.pdf?src-supplier=Compliance+Statements, ComponentLink13Description=http://sigma.octopart.com:80/rohs_statement/General-Multilayer-Ceramic-Capacitors-Samsung-family-132.pdf?src-supplier=Compliance+Statements, ComponentLink13URL=http://sigma.octopart.com:80/rohs_statement/General-Multilayer-Ceramic-Capacitors-Samsung-family-132.pdf?src-supplier=Compliance+Statements, ComponentLink14Description=http://sigma.octopart.com:80/reach_statement/General-Multilayer-Ceramic-Capacitors-Samsung-family-133.pdf?src-supplier=Compliance+Statements, ComponentLink14URL=http://sigma.octopart.com:80/reach_statement/General-Multilayer-Ceramic-Capacitors-Samsung-family-133.pdf?src-supplier=Compliance+Statements, Depth=800µm, Height=900µm, Length=1.6mm, Lifecycle Status=Production, Manufacturer Part Number=CL10C200JB8NNNC, Mounting Technology="Surface Mount", Number of Terminals=2, Pricing="1=0,1, 10=0,035, 50=0,0238, 100=0,0203, 500=0,01452, 1000=0,01275 (USD)", Radiation Hardening=No, REACH SVHC=Yes, RoHS=Compliant, Schedule B="8532240020, 8532240020|8532240020, 8532240020|8532240020|8532240020, 8532240020|8532240020|8532240020|8532240020", Stock=151954, Supplier=DigiKey, Thickness=889µm, Voltage Rating=50V, Voltage Rating (DC)=50V, Width=800µm
C10: library part GRM033R60J223KE01D, "0201 22 nF 6.3 V ±10% Tolerance X5R SMT Multilayer Ceramic Capacitor", Case Code (Imperial)=0201, Case Code (Metric)=0603, Dielectric=X5R, Dielectric Material=Ceramic, Manufacturer=Murata, Manufacturer Lifecycle Status="IN PRODUCTION", Max Operating Temperature=85°C, Min Operating Temperature=-55°C, Supplier Part Number=490-3169-1-ND, Tolerance=10%, Voltage=6.3V, Case/Package=0201, Category="Ceramic Capacitors", ComponentLink1Description=https://datasheet.octopart.com:443/GRM033R60J223KE01D-Murata-datasheet-8398336.pdf?src-supplier=element14+APAC, ComponentLink1URL=https://datasheet.octopart.com:443/GRM033R60J223KE01D-Murata-datasheet-8398336.pdf?src-supplier=element14+APAC, ComponentLink2Description=https://datasheet.octopart.com:443/GRM033R60J223KE01D-Murata-datasheet-62317030.pdf?src-supplier=element14+APAC, ComponentLink2URL=https://datasheet.octopart.com:443/GRM033R60J223KE01D-Murata-datasheet-62317030.pdf?src-supplier=element14+APAC, ComponentLink3Description=https://datasheet.octopart.com:443/GRM033R60J223KE01D-Murata-datasheet-8327535.pdf?src-supplier=_legacy+Avnet, ComponentLink3URL=https://datasheet.octopart.com:443/GRM033R60J223KE01D-Murata-datasheet-8327535.pdf?src-supplier=_legacy+Avnet, ComponentLink4Description=https://datasheet.octopart.com:443/GRM033R60J223KE01D-Murata-datasheet-14399030.pdf?src-supplier=Future+Electronics, ComponentLink4URL=https://datasheet.octopart.com:443/GRM033R60J223KE01D-Murata-datasheet-14399030.pdf?src-supplier=Future+Electronics, ComponentLink5Description=https://datasheet.octopart.com:443/GRM033R60J223KE01D-Murata-datasheet-22122223.pdf?src-supplier=Future+Electronics, ComponentLink5URL=https://datasheet.octopart.com:443/GRM033R60J223KE01D-Murata-datasheet-22122223.pdf?src-supplier=Future+Electronics, ComponentLink6Description=https://datasheet.octopart.com:443/GRM033R60J223KE01D-Murata-datasheet-44105384.pdf?src-supplier=Future+Electronics, ComponentLink6URL=https://datasheet.octopart.com:443/GRM033R60J223KE01D-Murata-datasheet-44105384.pdf?src-supplier=Future+Electronics, ComponentLink7Description=https://datasheet.octopart.com:443/GRM033R60J223KE01D-Murata-datasheet-165579666.pdf?src-supplier=TME, ComponentLink7URL=https://datasheet.octopart.com:443/GRM033R60J223KE01D-Murata-datasheet-165579666.pdf?src-supplier=TME, ComponentLink8Description=https://datasheet.octopart.com:443/GRM033R60J223KE01D-Murata-datasheet-141274201.pdf?src-supplier=Ciiva, ComponentLink8URL=https://datasheet.octopart.com:443/GRM033R60J223KE01D-Murata-datasheet-141274201.pdf?src-supplier=Ciiva, ComponentLink9Description=https://datasheet.octopart.com:443/GRM033R60J223KE01D-Murata-datasheet-140675770.pdf?src-supplier=Ciiva, ComponentLink9URL=https://datasheet.octopart.com:443/GRM033R60J223KE01D-Murata-datasheet-140675770.pdf?src-supplier=Ciiva, ComponentLink10Description=https://datasheet.octopart.com:443/GRM033R60J223KE01D-Murata-datasheet-138738347.pdf?src-supplier=Ciiva, ComponentLink10URL=https://datasheet.octopart.com:443/GRM033R60J223KE01D-Murata-datasheet-138738347.pdf?src-supplier=Ciiva, ComponentLink11Description=https://datasheet.octopart.com/GRM033R60J223KE01D-Murata-datasheet-12515295.pdf, ComponentLink11URL=https://datasheet.octopart.com/GRM033R60J223KE01D-Murata-datasheet-12515295.pdf, ComponentLink12Description=https://datasheet.octopart.com/GRM033R60J223KE01D-Murata-datasheet-12510076.pdf, ComponentLink12URL=https://datasheet.octopart.com/GRM033R60J223KE01D-Murata-datasheet-12510076.pdf, ComponentLink13Description=https://datasheet.octopart.com/GRM033R60J223KE01D-Murata-datasheet-11978611.pdf, ComponentLink13URL=https://datasheet.octopart.com/GRM033R60J223KE01D-Murata-datasheet-11978611.pdf, ComponentLink14Description=https://datasheet.octopart.com/GRM033R60J223KE01D-Murata-datasheet-10025737.pdf, ComponentLink14URL=https://datasheet.octopart.com/GRM033R60J223KE01D-Murata-datasheet-10025737.pdf, ComponentLink15Description=https://datasheet.octopart.com/GRM033R60J223KE01D-Murata-datasheet-8819587.pdf, ComponentLink15URL=https://datasheet.octopart.com/GRM033R60J223KE01D-Murata-datasheet-8819587.pdf, ComponentLink16Description=https://datasheet.octopart.com:443/GRM033R60J223KE01D.-Murata-datasheet-5332913.pdf?src-supplier=Farnell, ComponentLink16URL=https://datasheet.octopart.com:443/GRM033R60J223KE01D.-Murata-datasheet-5332913.pdf?src-supplier=Farnell, ComponentLink17Description=https://datasheet.octopart.com:443/GRM033R60J223KE01D-Murata-datasheet-148210.pdf?src-supplier=Garrett, ComponentLink17URL=https://datasheet.octopart.com:443/GRM033R60J223KE01D-Murata-datasheet-148210.pdf?src-supplier=Garrett, ComponentLink18Description=https://datasheet.octopart.com:443/GRM033R60J223KE01D-Murata-datasheet-118811.pdf?src-supplier=DigiKey, ComponentLink18URL=https://datasheet.octopart.com:443/GRM033R60J223KE01D-Murata-datasheet-118811.pdf?src-supplier=DigiKey, ComponentLink19Description=http://sigma.octopart.com:80/reach_statement/Murata-company-16.pdf?src-supplier=Compliance+Statements, ComponentLink19URL=http://sigma.octopart.com:80/reach_statement/Murata-company-16.pdf?src-supplier=Compliance+Statements, Depth=300µm, Height=300µm, Lead Free="Lead Free", Length=600µm, Lifecycle Status=Production, Manufacturer Part Number=GRM033R60J223KE01D, Material=Ceramic, Mounting Technology="Surface Mount", Number of Terminals=2, Packaging="Cut Tape", Pins=2, Pricing="1=0,1, 10=0,039, 50=0,0262, 100=0,0225, 500=0,01582, 1000=0,01271, 2500=0,01092 (USD)", Radiation Hardening=No, REACH SVHC=Yes, RoHS=Compliant, Schedule B="8532240020, 8532240020|8532240020, 8532240020|8532240020|8532240020, 8532240020|8532240020|8532240020|8532240020", Stock=1654104, Supplier=DigiKey, Termination=SMD/SMT, Thickness=300µm, Voltage Rating=6.3V, Voltage Rating (DC)=6.3V, Width=300µm
C11: library part LMK107BBJ106MALT, "Multilayer Ceramic Capacitors (High dielectric type), 10V, 10 uF, ± 20 %, 0603, X5R, RoHS", Case Code (Imperial)=0603, Case Code (Metric)=1608, Dielectric=X5R, Dielectric Material=Ceramic, Manufacturer="Taiyo Yuden", Max Operating Temperature=85°C, Min Operating Temperature=-55°C, Supplier Part Number=587-3258-1-ND, Tolerance=20%, Voltage=10V, Case/Package=0603, Category="Ceramic Capacitors", ComponentLink1Description=https://datasheet.octopart.com:443/LMK107BBJ106MALT-Taiyo-Yuden-datasheet-182109547.pdf?src-supplier=IHS, ComponentLink1URL=https://datasheet.octopart.com:443/LMK107BBJ106MALT-Taiyo-Yuden-datasheet-182109547.pdf?src-supplier=IHS, ComponentLink2Description=https://datasheet.octopart.com:443/LMK107BBJ106MALT-Taiyo-Yuden-datasheet-151625811.pdf?src-supplier=element14+APAC, ComponentLink2URL=https://datasheet.octopart.com:443/LMK107BBJ106MALT-Taiyo-Yuden-datasheet-151625811.pdf?src-supplier=element14+APAC, ComponentLink3Description=https://datasheet.octopart.com:443/LMK107BBJ106MALT-Taiyo-Yuden-datasheet-21408036.pdf?src-supplier=element14+APAC, ComponentLink3URL=https://datasheet.octopart.com:443/LMK107BBJ106MALT-Taiyo-Yuden-datasheet-21408036.pdf?src-supplier=element14+APAC, ComponentLink4Description=https://datasheet.octopart.com:443/LMK107BBJ106MALT-Taiyo-Yuden-datasheet-41194858.pdf?src-supplier=Newark, ComponentLink4URL=https://datasheet.octopart.com:443/LMK107BBJ106MALT-Taiyo-Yuden-datasheet-41194858.pdf?src-supplier=Newark, ComponentLink5Description=https://datasheet.octopart.com:443/LMK107BBJ106MALT-Taiyo-Yuden-datasheet-8857305.pdf?src-supplier=Newark, ComponentLink5URL=https://datasheet.octopart.com:443/LMK107BBJ106MALT-Taiyo-Yuden-datasheet-8857305.pdf?src-supplier=Newark, ComponentLink6Description=https://datasheet.octopart.com:443/LMK107BBJ106MALT-Taiyo-Yuden-datasheet-8434558.pdf?src-supplier=Newark, ComponentLink6URL=https://datasheet.octopart.com:443/LMK107BBJ106MALT-Taiyo-Yuden-datasheet-8434558.pdf?src-supplier=Newark, ComponentLink7Description=https://datasheet.octopart.com:443/LMK107BBJ106MALT-Taiyo-Yuden-datasheet-154807907.pdf?src-supplier=Master+Electronics, ComponentLink7URL=https://datasheet.octopart.com:443/LMK107BBJ106MALT-Taiyo-Yuden-datasheet-154807907.pdf?src-supplier=Master+Electronics, ComponentLink8Description=https://datasheet.octopart.com:443/LMK107BBJ106MALT-Taiyo-Yuden-datasheet-140424376.pdf?src-supplier=Master+Electronics, ComponentLink8URL=https://datasheet.octopart.com:443/LMK107BBJ106MALT-Taiyo-Yuden-datasheet-140424376.pdf?src-supplier=Master+Electronics, ComponentLink9Description=https://datasheet.octopart.com:443/LMK107BBJ106MALT-Taiyo-Yuden-datasheet-10851928.pdf?src-supplier=Future+Electronics, ComponentLink9URL=https://datasheet.octopart.com:443/LMK107BBJ106MALT-Taiyo-Yuden-datasheet-10851928.pdf?src-supplier=Future+Electronics, ComponentLink10Description=https://datasheet.octopart.com:443/LMK107BBJ106MALT-Taiyo-Yuden-datasheet-100443364.pdf?src-supplier=Future+Electronics, ComponentLink10URL=https://datasheet.octopart.com:443/LMK107BBJ106MALT-Taiyo-Yuden-datasheet-100443364.pdf?src-supplier=Future+Electronics, ComponentLink11Description=https://datasheet.octopart.com:443/LMK107BBJ106MALT-Taiyo-Yuden-datasheet-99833423.pdf?src-supplier=Future+Electronics, ComponentLink11URL=https://datasheet.octopart.com:443/LMK107BBJ106MALT-Taiyo-Yuden-datasheet-99833423.pdf?src-supplier=Future+Electronics, ComponentLink12Description=https://datasheet.octopart.com:443/LMK107BBJ106MALT-Taiyo-Yuden-datasheet-99833418.pdf?src-supplier=Future+Electronics, ComponentLink12URL=https://datasheet.octopart.com:443/LMK107BBJ106MALT-Taiyo-Yuden-datasheet-99833418.pdf?src-supplier=Future+Electronics, ComponentLink13Description=https://datasheet.octopart.com:443/LMK107BBJ106MALT-Taiyo-Yuden-datasheet-138738940.pdf?src-supplier=Taiyo+Yuden+SCT, ComponentLink13URL=https://datasheet.octopart.com:443/LMK107BBJ106MALT-Taiyo-Yuden-datasheet-138738940.pdf?src-supplier=Taiyo+Yuden+SCT, Composition=Ceramic, Depth=800µm, Height=800µm, Lead Free="Lead Free", Length=1.6mm, Lifecycle Status=Production, Manufacturer Part Number=LMK107BBJ106MALT, Material=Ceramic, Mounting Technology="Surface Mount", Number of Terminals=2, Pricing="1=0,08, 10=0,046, 50=0,036, 100=0,0256, 500=0,0212, 1000=0,01928 (USD)", Radiation Hardening=No, REACH SVHC=Yes, RoHS=Compliant, Stock=1593340, Supplier=DigiKey, Termination=SMD/SMT, Thickness=889µm, Voltage Rating=10V, Voltage Rating (DC)=10V, Width=800µm
D1 D2 D3 D4 D5 D6 D7 D8 D9 D10 D11 D12 D13 D14 D15: library part 1N4148WX-TP, "Diode, Rectifier, Fast, Vr 100V, If 300MA, Pkg SOD-323, Vf 1V, Trr 4NS, Cj 4PF, Tj +150C", Average Rectified Current=150mA, Current Rating=300mA, Forward Voltage=1V, Manufacturer=MCC, Max Forward Surge Current (Ifsm)=2A, Max Junction Temperature (Tj)=150°C, Max Power Dissipation=200mW, Max Repetitive Reverse Voltage (Vrrm)=100V, Max Reverse Leakage Current=5µA, Max Reverse Voltage (DC)=75V, Min Operating Temperature=-55°C, Peak Reverse Current=1µA, Supplier Part Number=1N4148WXTPMSCT-ND, Category="Rectifier Diodes", China RoHS=Compliant, ComponentLink1Description=https://datasheet.octopart.com:443/1N4148WX-TP-MCC-datasheet-179877993.pdf?src-supplier=IHS, ComponentLink1URL=https://datasheet.octopart.com:443/1N4148WX-TP-MCC-datasheet-179877993.pdf?src-supplier=IHS, ComponentLink2Description=https://datasheet.octopart.com:443/1N4148WX-TP-Micro-Commercial-datasheet-72882.pdf?src-supplier=Farnell, ComponentLink2URL=https://datasheet.octopart.com:443/1N4148WX-TP-Micro-Commercial-datasheet-72882.pdf?src-supplier=Farnell, ComponentLink3Description=https://datasheet.octopart.com:443/1N4148WX-TP-MCC-datasheet-136280619.pdf?src-supplier=TME, ComponentLink3URL=https://datasheet.octopart.com:443/1N4148WX-TP-MCC-datasheet-136280619.pdf?src-supplier=TME, ComponentLink4Description=https://datasheet.octopart.com:443/1N4148WX-TP-MCC-datasheet-133511571.pdf?src-supplier=Future+Electronics, ComponentLink4URL=https://datasheet.octopart.com:443/1N4148WX-TP-MCC-datasheet-133511571.pdf?src-supplier=Future+Electronics, ComponentLink5Description=https://datasheet.octopart.com:443/1N4148WX-TP-Micro-Commercial-datasheet-13551187.pdf?src-supplier=Future+Electronics, ComponentLink5URL=https://datasheet.octopart.com:443/1N4148WX-TP-Micro-Commercial-datasheet-13551187.pdf?src-supplier=Future+Electronics, ComponentLink6Description=https://datasheet.octopart.com:443/1N4148WX-TP-MCC-datasheet-8327246.pdf?src-supplier=Future+Electronics, ComponentLink6URL=https://datasheet.octopart.com:443/1N4148WX-TP-MCC-datasheet-8327246.pdf?src-supplier=Future+Electronics, ComponentLink7Description=https://datasheet.octopart.com:443/1N4148WX-TP-MCC-datasheet-9772772.pdf?src-supplier=RS+(Formerly+Allied+Electronics), ComponentLink7URL=https://datasheet.octopart.com:443/1N4148WX-TP-MCC-datasheet-9772772.pdf?src-supplier=RS+(Formerly+Allied+Electronics), ComponentLink8Description=https://datasheet.octopart.com:443/1N4148WX-TP-MCC-datasheet-60845.pdf?src-supplier=Mouser, ComponentLink8URL=https://datasheet.octopart.com:443/1N4148WX-TP-MCC-datasheet-60845.pdf?src-supplier=Mouser, Element Configuration=Single, Forward Current=300mA, Height=1.15mm, Lead Free="Lead Free", Length=1.8mm, Lifecycle Status=Production, Manufacturer Part Number=1N4148WX-TP, Max Operating Temperature=150°C, Max Output current=150mA, Max Surge Current=2A, Mounting Technology="Surface Mount", Number of Elements=1, Number of Terminals=2, Output Current=300mA, Packaging="Cut Tape", Peak Non-Repetitive Surge Current=2A, Pins=2, Polarity=Standard, Power Dissipation=200mW, Pricing="1=0,1, 10=0,061, 100=0,0373, 500=0,02676, 1000=0,02334 (USD)", Radiation Hardening=No, REACH SVHC=Yes, Recovery Time=4ns, Reverse Recovery Time=4ns, Reverse Standoff Voltage=75V, Reverse Voltage=100V, RoHS=Compliant, Schedule B="8541100070, 8541100080, 8541100080|8541100080|8541100080|8541100080|8541100080", Stock=1138604, Supplier=DigiKey, Voltage Rating (DC)=75V, Width=1.35mm
F1: library part ERBRD0R50X, "Fuse Chip Fast Acting 0.5A 32V SMD Solder Pad 0402 1 X 0.5 X 0.39mm T/R UL/cUL", Case Code (Imperial)=0402, Case Code (Metric)=1005, Current=500mA, Manufacturer=Panasonic, Max Operating Temperature=125°C, Max Voltage Rating (DC)=32V, Min Operating Temperature=-40°C, Supplier Part Number=P15122CT-ND, Approvals=UL, Body Material=Alumina, Case/Package=0402, Category=Fuses, ComponentLink1Description=https://datasheet.octopart.com:443/ERBRD0R50X-Panasonic-datasheet-180975427.pdf?src-supplier=IHS, ComponentLink1URL=https://datasheet.octopart.com:443/ERBRD0R50X-Panasonic-datasheet-180975427.pdf?src-supplier=IHS, ComponentLink2Description=https://datasheet.octopart.com:443/ERBRD0R50X-Panasonic-datasheet-78834729.pdf?src-supplier=Upverter, ComponentLink2URL=https://datasheet.octopart.com:443/ERBRD0R50X-Panasonic-datasheet-78834729.pdf?src-supplier=Upverter, ComponentLink3Description=https://datasheet.octopart.com:443/ERBRD0R50X-Panasonic-datasheet-136807619.pdf?src-supplier=Master+Electronics, ComponentLink3URL=https://datasheet.octopart.com:443/ERBRD0R50X-Panasonic-datasheet-136807619.pdf?src-supplier=Master+Electronics, ComponentLink4Description=https://datasheet.octopart.com:443/ERBRD0R50X-Panasonic-datasheet-10129016.pdf?src-supplier=Newark, ComponentLink4URL=https://datasheet.octopart.com:443/ERBRD0R50X-Panasonic-datasheet-10129016.pdf?src-supplier=Newark, ComponentLink5Description=https://datasheet.octopart.com:443/ERB-RD0R50X-Panasonic-datasheet-11844109.pdf?src-supplier=Electro+Sonic, ComponentLink5URL=https://datasheet.octopart.com:443/ERB-RD0R50X-Panasonic-datasheet-11844109.pdf?src-supplier=Electro+Sonic, Current Rating=500mA, Fuse Current=500mA, Height=390µm, Length=1mm, Lifecycle Status=Production, Manufacturer Part Number=ERBRD0R50X, Mounting Technology="Surface Mount", Packaging="Cut Tape", Pins=2, Pricing="1=0,29, 5=0,238, 10=0,219, 50=0,182, 100=0,1679, 250=0,151, 500=0,1393, 1000=0,12849, 5000=0,1071 (USD)", REACH SVHC=Yes, RoHS=Compliant, Stock=245517, Supplier=DigiKey, Voltage Rating=32V, Voltage Rating (DC)=32V, Width=500µm